# Altium PCB PCB.PcbDoc
Units mil, origin at the board's own origin, x right, y up, seen from the top; angles counter-clockwise.
Board outline 3380 x 980.2 mil, 2 copper layers (Top Layer, Bottom Layer); 18 components, 32 nets, 186 pads, 0 vias.
Unrouted connection lines stored in the file: 109.
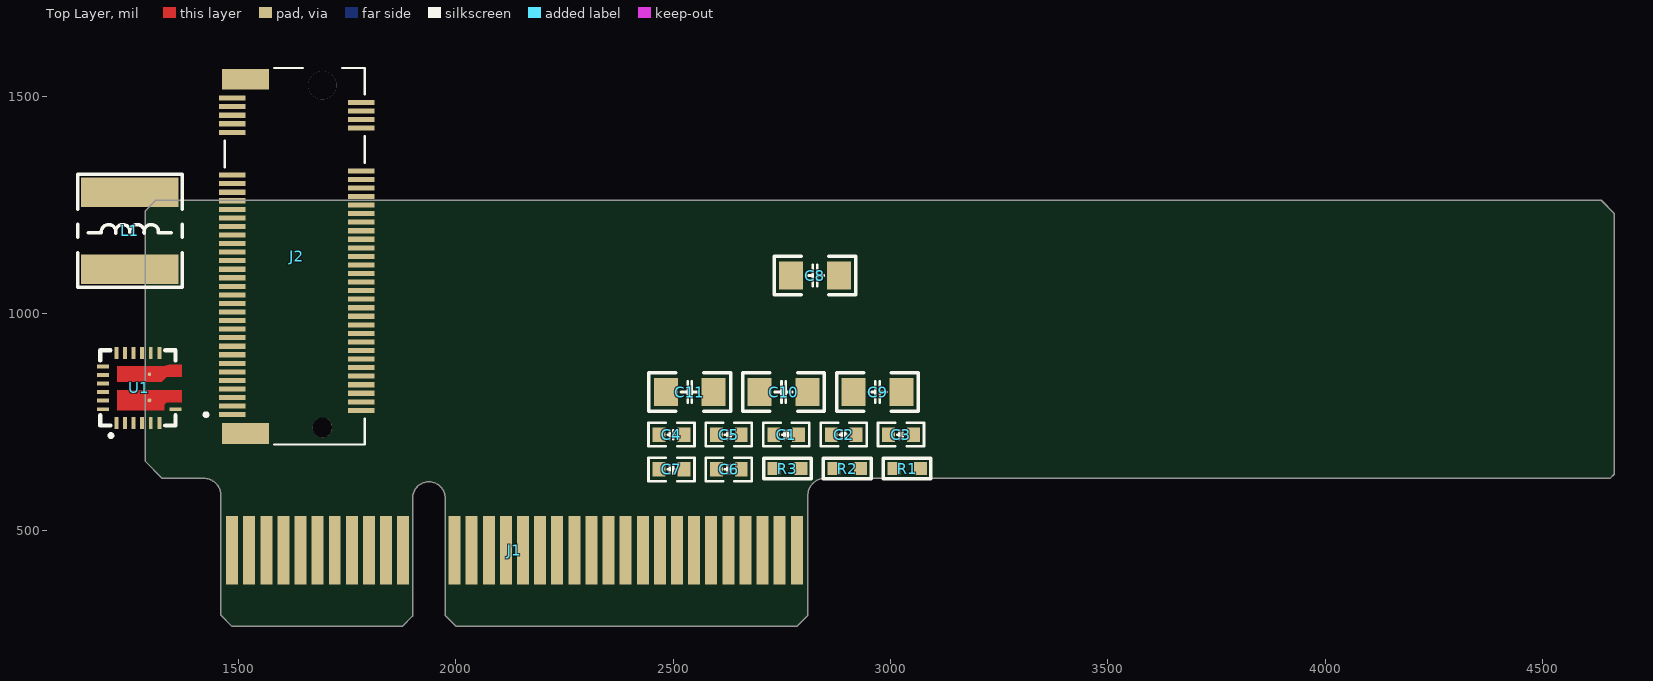
[diagram p0: Top Layer view]
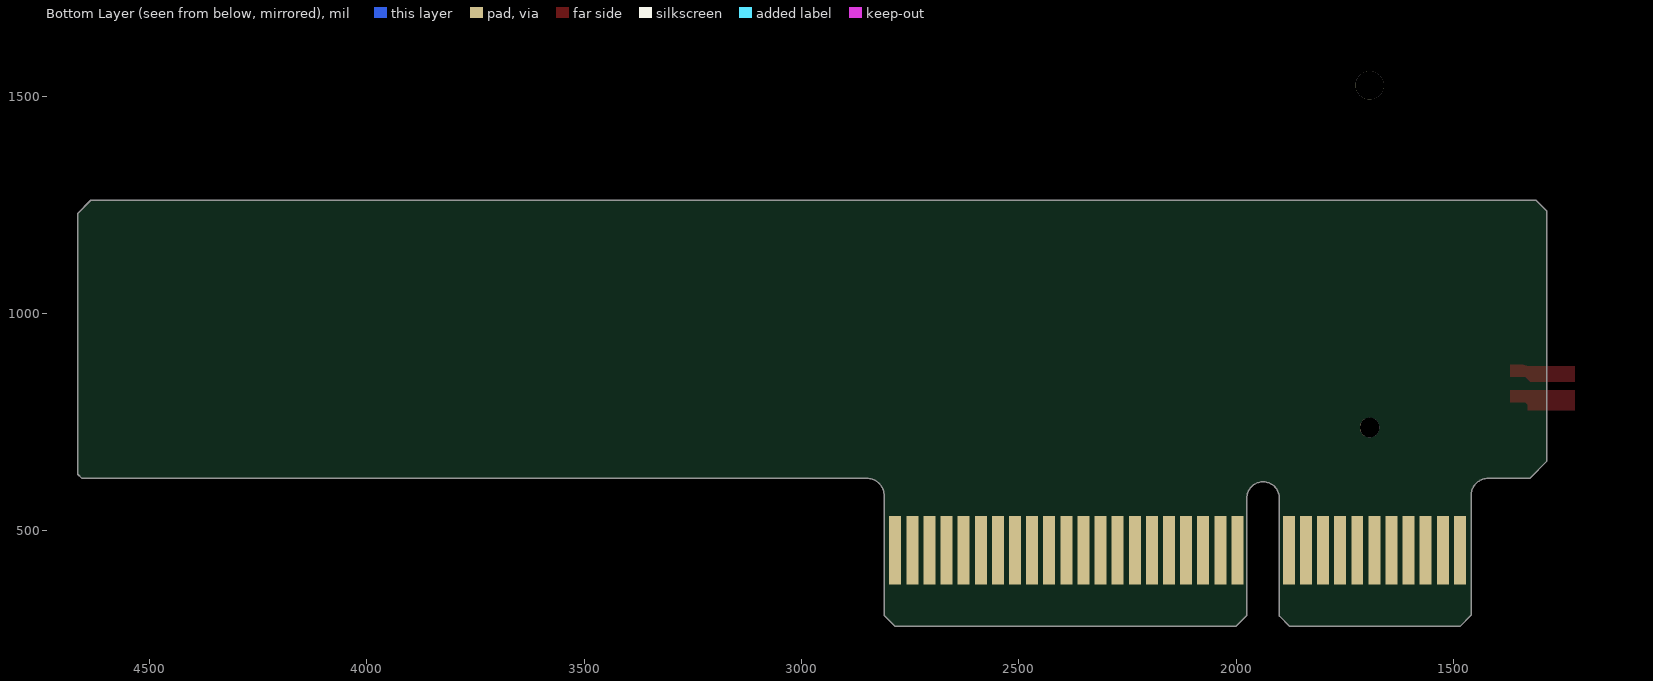
[diagram p1: Bottom Layer view, seen from below]

## Layer stack, top to bottom
Top Solder: solder mask 0.4, Solder Resist, Dk 3.5
Top Layer: signal copper 1.4
Dielectric 1: dielectric 12.6, FR-4, Dk 4.8
Bottom Layer: signal copper 1.4
Bottom Solder: solder mask 0.4, Solder Resist, Dk 3.5

## Board outline
1459.48,305.39 1485.08,279.8 1876.81,279.8 1900.43,303.42 1900.43,575.08 cw(c1937.83,575.08) 1975.23,575.08 1975.23,305.39 2000.82,279.8 2784.29,279.8 2809.88,305.39 2809.88,580.98 cw(c2849.25,580.98) 2849.25,620.35 4655.35,620.35 4665,630 4665,1230 4635,1260 1310,1260 1285,1235 1285,660 1324.65,620.35 1420.11,620.35 cw(c1420.11,580.98) 1459.48,580.98

## Design rules (kind name [scope] priority, off if disabled: settings)
Clearance [All] p1: gap=10 ignorepadtopadclearanceinfootprint=FALSE except(0: Arc-Hole Track-Hole SMDPad-Hole THPad-Hole Via-Hole Fill-Hole Poly-Hole Region-Hole Text-Hole)
DiffPairsRouting [All] p1: maxlimit=10 minlimit=10 mostfreqgap=10 toplayer_minwidth=15 toplayer_maxwidth=15 toplayer_prefwidth=15 bottomlayer_minwidth=15 bottomlayer_maxwidth=15 bottomlayer_prefwidth=15 maxuncoupledlength=500
PolygonConnect [All] p1: connectstyle=Relief reliefconductorwidth=10 reliefentries=4 polygonreliefangle="90 Angle" airgapwidth=10
RoutingVias [All] p1: holewidth=28 width=50 viastyle="Through Hole" minholewidth=28 minwidth=50 maxholewidth=28 maxwidth=50
SolderMaskExpansion [All] p1: expansion=4 istentingtop=FALSE
Width [All] p1: maxlimit=10 minlimit=10 preferedwidth=10
29 further rules are at their usual default settings.

## Classes and differential pairs
differential pair REFCLK: +REFCLK_P -REFCLK_N

## Components (designator, comment, footprint, x,y, rotation, side; value= is the part's Value field where it differs from the comment)
C1 "100nF 50V" C0603_l 2760,721 r0 top
C2 "10uF 35V" C0603_l 2892,721 r0 top
C3 "100nF 50V" C0603_l 3024,721 r0 top
C4 "100nF 50V" C0603_l 2496,721 r0 top
C5 "100nF 50V" C0603_l 2628,721 r0 top
C6 "100nF 50V" C0603_l 2628,641 r0 top
C7 "100nF 50V" C0603_l 2496,641 r0 top
C8 "47uF 10V" C1206_l 2826,1087 r0 top
C9 "47uF 10V" C1206_l 2970,819 r0 top
C10 "22uF 35V" C1206_l 2754,819 r0 top
C11 "22uF 35V" C1206_l 2538,819 r0 top
J1 "Pcie Gen4 x4" PCIEDGE_X4-A 1859.09,423.5 r0 top
J2 "m.2 socket m-key" "M.2接口 4.2H" 1692.68,1131.06 r90 top
L1 "2.2uH" NR6028 1250,1190 r90 top
R1 "1R 1%" "R 0603_L" 3038.11,643 r0 top
R2 "1R 1%" "R 0603_L" 2900.47,643 r0 top
R3 "100k 1%" "R 0603_L" 2762.82,643 r0 top
U1 "GS9238-ATQ-R" TQFN-23_L4.0-W4.0-P0.50-BL_GS9238TQ-R 1271.55,828.42 r0 top

## Footprints (in the part's own frame and the unit in brackets; to place one, negate y for a bottom-side part, rotate by r counter-clockwise, add the part's x,y. Pads: shape width x height; smd on the part's side, far side on the other; paste and mask are expansions set on the pad)
C0603_l [mm] "贴片MLCC电容"
  rect 0.75x0.85 smd: 1(-0.725,0) 2(0.725,0)
  silkscreen extent -1.35,-0.69 1.35,0.69, body extent -0.8,-0.4 0.8,0.4, height 0.8
C1206_l [mm] "贴片MLCC电容"
  rect 1.4x1.65 smd: 1(-1.4,0) 2(1.4,0)
  silkscreen extent -2.39,-1.12 2.39,1.12, body extent -1.6,-0.8 1.6,0.8, height 1.1
"M.2接口 4.2H" [mm]
  rect 0.3x1.55 smd: 1(-9.25,5.275) 2(-9,-2.275) 3(-8.75,5.275) 4(-8.5,-2.275) 5(-8.25,5.275) 6(-8,-2.275) 7(-7.75,5.275) 8(-7.5,-2.275) 9(-7.25,5.275) 10(-7,-2.275) 11(-6.75,5.275) 12(-6.5,-2.275) 13(-6.25,5.275) 14(-6,-2.275) 15(-5.75,5.275) 16(-5.5,-2.275) 17(-5.25,5.275) 18(-5,-2.275) 19(-4.75,5.275) 20(-4.5,-2.275) 21(-4.25,5.275) 22(-4,-2.275) 23(-3.75,5.275) 24(-3.5,-2.275) 25(-3.25,5.275) 26(-3,-2.275) 27(-2.75,5.275) 28(-2.5,-2.275) 29(-2.25,5.275) 30(-2,-2.275) 31(-1.75,5.275) 32(-1.5,-2.275) 33(-1.25,5.275) 34(-1,-2.275) 35(-0.75,5.275) 36(-0.5,-2.275) 37(-0.25,5.275) 38(0,-2.275) 39(0.25,5.275) 40(0.5,-2.275) 41(0.75,5.275) 42(1,-2.275) 43(1.25,5.275) 44(1.5,-2.275) 45(1.75,5.275) 46(2,-2.275) 47(2.25,5.275) 48(2.5,-2.275) 49(2.75,5.275) 50(3,-2.275) 51(3.25,5.275) 52(3.5,-2.275) 53(3.75,5.275) 54(4,-2.275) 55(4.25,5.275) 56(4.5,-2.275) 57(4.75,5.275) 58(5,-2.275) 67(7.25,5.275) 68(7.5,-2.275) 69(7.75,5.275) 70(8,-2.275) 71(8.25,5.275) 72(8.5,-2.275) 73(8.75,5.275) 74(9,-2.275) 75(9.25,5.275)
  rect 1.2x2.75 smd: S1(-10.35,4.5) S2(10.35,4.5)
  round 1.15 hole 1.15 unplated: ""(-10,0)
  round 1.65 hole 1.65 unplated: ""(10,0)
  silkscreen extent -11,-2.48 11,6.9, body extent -11,-2.85 11,5.7, height 4.23
NR6028 [mm] "6.0mm*6.0mm*2.8mm(长*宽*高）"
  rect 1.7x5.7 smd: 1(-2.25,0) 2(2.25,0)
  silkscreen extent -3.3,-3.05 3.3,3.05, body extent -3,-3 3,3, height 2.9
PCIEDGE_X4-A [mm] "PCIEx4金手指"
  rect 0.7x4 smd far side paste+0 mask+0.051: A1(-9.5,0.8) A2(-8.5,0.8) A3(-7.5,0.8) A4(-6.5,0.8) A5(-5.5,0.8) A6(-4.5,0.8) A7(-3.5,0.8) A8(-2.5,0.8) A9(-1.5,0.8) A10(-0.5,0.8) A11(0.5,0.8) A12(3.5,0.8) A13(4.5,0.8) A14(5.5,0.8) A15(6.5,0.8) A16(7.5,0.8) A17(8.5,0.8) A18(9.5,0.8) A19(10.5,0.8) A20(11.5,0.8) A21(12.5,0.8) A22(13.5,0.8) A23(14.5,0.8) A24(15.5,0.8) A25(16.5,0.8) A26(17.5,0.8) A27(18.5,0.8) A28(19.5,0.8) A29(20.5,0.8) A30(21.5,0.8) A31(22.5,0.8) A32(23.5,0.8)
  rect 0.7x4 smd paste+0 mask+0.051: B1(-9.5,0.8) B2(-8.5,0.8) B3(-7.5,0.8) B4(-6.5,0.8) B5(-5.5,0.8) B6(-4.5,0.8) B7(-3.5,0.8) B8(-2.5,0.8) B9(-1.5,0.8) B10(-0.5,0.8) B11(0.5,0.8) B12(3.5,0.8) B13(4.5,0.8) B14(5.5,0.8) B15(6.5,0.8) B16(7.5,0.8) B17(8.5,0.8) B18(9.5,0.8) B19(10.5,0.8) B20(11.5,0.8) B21(12.5,0.8) B22(13.5,0.8) B23(14.5,0.8) B24(15.5,0.8) B25(16.5,0.8) B26(17.5,0.8) B27(18.5,0.8) B28(19.5,0.8) B29(20.5,0.8) B30(21.5,0.8) B31(22.5,0.8) B32(23.5,0.8)
"R 0603_L" [mil] "1/10W贴片电阻"
  rect 30x30 smd: 1(-30.59,0) 2(30.59,0)
  silkscreen extent -55,-24 55,24, body extent -31,-16 32,16, height 16
TQFN-23_L4.0-W4.0-P0.50-BL_GS9238TQ-R [mm]
  rect 0.23x0.7 smd: 1(-1.329,-2.05) 2(-0.829,-2.05) 3(-0.329,-2.05) 4(0.171,-2.05) 5(0.671,-2.05) 6(1.171,-2.05) 12(1.171,2.05) 13(0.671,2.05) 14(0.171,2.05) 15(-0.329,2.05) 16(-0.829,2.05) 17(-1.329,2.05)
  rect 0.7x0.23 smd: 7(2.121,-1.247) 18(-2.121,1.253) 19(-2.121,0.753) 20(-2.121,0.253) 21(-2.121,-0.247) 22(-2.121,-0.747) 23(-2.121,-1.247)
  round 0.23 smd: 24(0.596,-0.722)
  round 0.2 smd: 25(0.596,0.803)
  Top Layer region: -1.279,1.253 1.421,1.253 1.721,1.353 2.471,1.353 2.471,0.653 1.621,0.653 1.321,0.353 -1.279,0.353 -1.279,1.253
  Top Layer region: -1.279,-0.147 2.471,-0.147 2.471,-0.847 1.621,-0.847 1.471,-0.997 1.471,-1.297 -1.279,-1.297 -1.279,-0.147
  silkscreen extent -2.28,-2.88 2.12,2.2, body extent -2.07,-2 1.93,2, height 0.75

## Part data
C1 C2 C3 C4 C5 C6 C7 C8 C9 C10 C11: library part C, "无极性贴片电容", BOM名称=无极性贴片电容, 学习资源=www.ooocke.com, 材质=X7R, 版权归属=源创客
J2: library part M.2接口, "M.2接口", Package=None, Availability=Unavailable, MF="Amphenol ICC (FCI)", MP=MDT420M01002, Price=None
L1: library part L, "小功率贴片电感", BOM名称=小功率贴片电感, 学习资源=www.ooocke.com, 版权归属=源创客
R1 R2 R3: library part R, "贴片电阻", BOM名称=贴片电阻, 学习资源=www.ooocke.com, 版权归属=源创客
U1: "DCDC降压芯片"

## Nets (pads, with @x,y where several pads share a name; then routed paths per layer and width w, separated by ;. In a path a pad name is that pad's centre, name@x,y a point inside that pad or via, vN(x,y) a via of type N, cw(c..) or ccw(c..) an arc to the next point about the centre after c; other vN are vias at no path point)
AGND-1: R1.1 U1.4
ENABLE: U1.2
GND: J1.A4 J1.A12 J1.A15 J1.A18 J1.A20 J1.A23 J1.A24 J1.A27 J1.A28 J1.A31 J1.B4 J1.B7 J1.B13 J1.B16 J1.B18 J1.B21 J1.B22 J1.B25 J1.B26 J1.B29 J1.B32 J2.1 J2.3 J2.9 J2.15 J2.21 J2.27 J2.33 J2.39 J2.45 J2.51 J2.57 J2.71 J2.73 J2.75 J2.S1 J2.S2
NetC1_1: C1.1 L1.2 U1.16 U1.17 U1.18 U1.25
NetC1_2: C1.2 U1.20
NetC2_1: C2.1 U1.21
NetC3_1: C3.1 U1.23
NetR1_2: R1.2 R2.1 U1.5
NetR3_2: R3.2 U1.6
PERST#: J1.A11 J2.50
PGND: C2.2 C3.2 C4.1 C5.1 C6.1 C7.1 C8.1 C9.1 C10.1 C11.1 U1.12 U1.13 U1.14 U1.15 U1.19
REFCLK_N: J1.A14 J2.53
REFCLK_P: J1.A13 J2.55
RX0_N: J1.B15 J2.41
RX0_P: J1.B14 J2.43
RX1_N: J1.B20 J2.29
RX1_P: J1.B19 J2.31
RX2_N: J1.B24 J2.17
RX2_P: J1.B23 J2.19
RX3_N: J1.B28 J2.7
RX3_P: J1.B27 J2.5
TX0_N: J1.A17 J2.47
TX0_P: J1.A16 J2.49
TX1_N: J1.A22 J2.35
TX1_P: J1.A21 J2.37
TX2_N: J1.A26 J2.23
TX2_P: J1.A25 J2.25
TX3_N: J1.A30 J2.11
TX3_P: J1.A29 J2.13
VCC3.3V: C4.2 C5.2 C8.2 C9.2 J2.2 J2.4 J2.12 J2.14 J2.16 J2.18 J2.70 J2.72 J2.74 L1.1 R2.2
VCC12V: C6.2 C7.2 C10.2 C11.2 J1.A2 J1.A3 J1.B1 J1.B2 J1.B3 R3.1 U1.3 U1.7 U1.22 U1.24
WAKE#: J1.B11 J2.54
pads on no net: J1.A1 J1.A5 J1.A6 J1.A7 J1.A8 J1.A9 J1.A10 J1.A19 J1.A32 J1.B5 J1.B6 J1.B8 J1.B9 J1.B10 J1.B12 J1.B17 J1.B30 J1.B31 J2. J2.6 J2.8 J2.10 J2.20 J2.22 J2.24 J2.26 J2.28 J2.30 J2.32 J2.34 J2.36 J2.38 J2.40 J2.42 J2.44 J2.46 J2.48 J2.52 J2.56 J2.58 J2.67 J2.68 J2.69 U1.1

## Silkscreen, mask and mechanical layers (free items; w line width, h text height)
Mechanical 1:
  lines w6: 1386.65,620.35 1324.65,620.35 1285,660 1285,1235 1310,1260 3680,1260 4635,1260 4665,1230 4665,630 4655.35,620.35 2880.74,620.35
  lines w10: 1386.65,620.35 1420.11,620.35 cw(c1420.11,580.98) 1459.48,580.98 1459.48,305.39 1485.08,279.8 1876.81,279.8 1900.43,303.42 1900.43,575.08 cw(c1937.83,575.08) 1975.23,575.08 1975.23,305.39 2000.82,279.8 2784.29,279.8 2809.88,305.39 2809.88,580.98 cw(c2849.25,580.98) 2849.25,620.35 2880.74,620.35